# Altium PCB TYPEB.PcbDoc
Units mm, origin at the board's own origin, x right, y up, seen from the top; angles counter-clockwise.
Board outline 17.3 x 11 mm, 2 copper layers (Top Layer, Bottom Layer), stack 1.5 mm thick; 12 components, 5 nets, 48 pads, 0 vias.
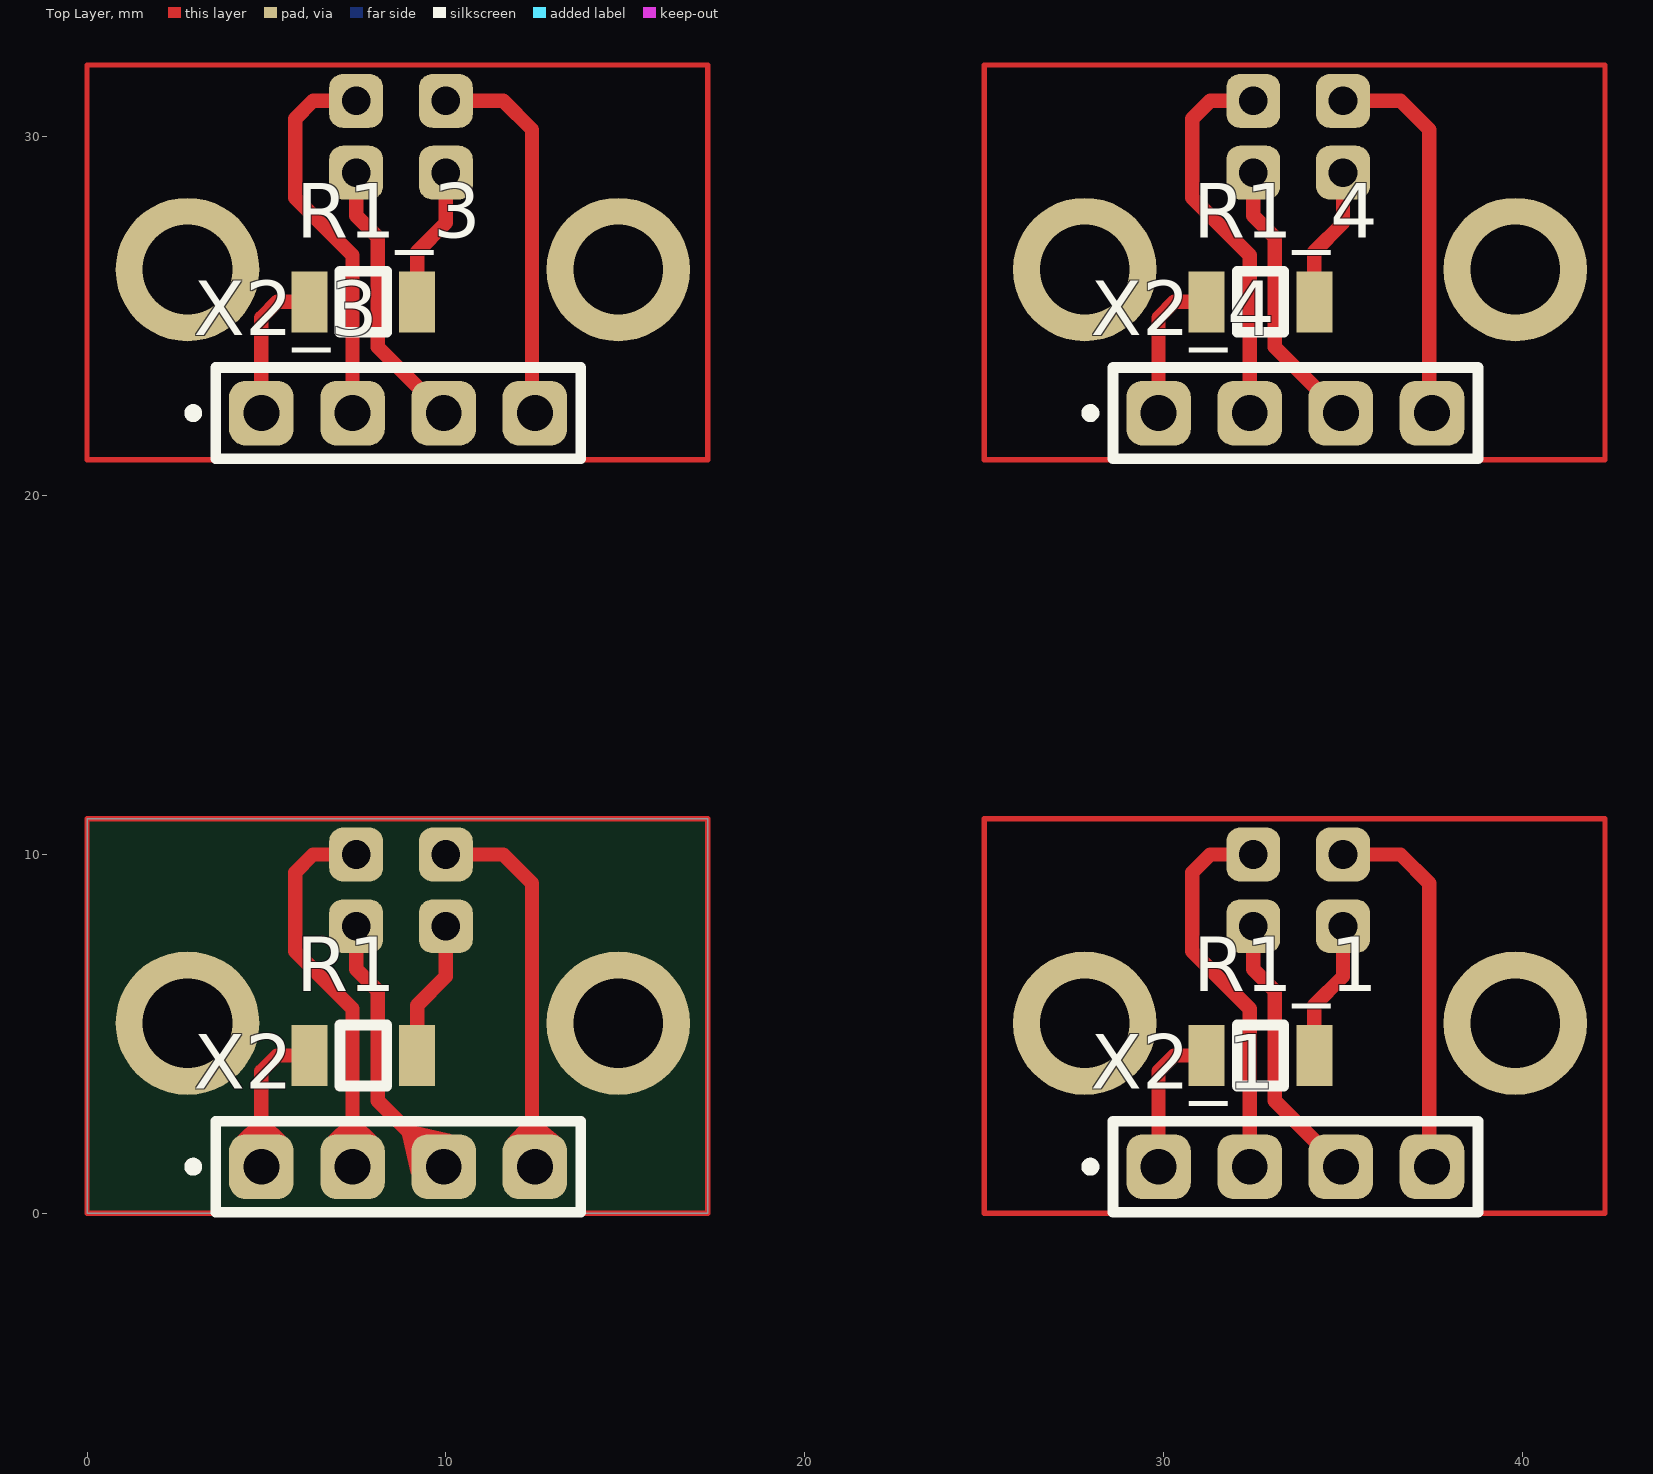
[diagram p0: Top Layer view]
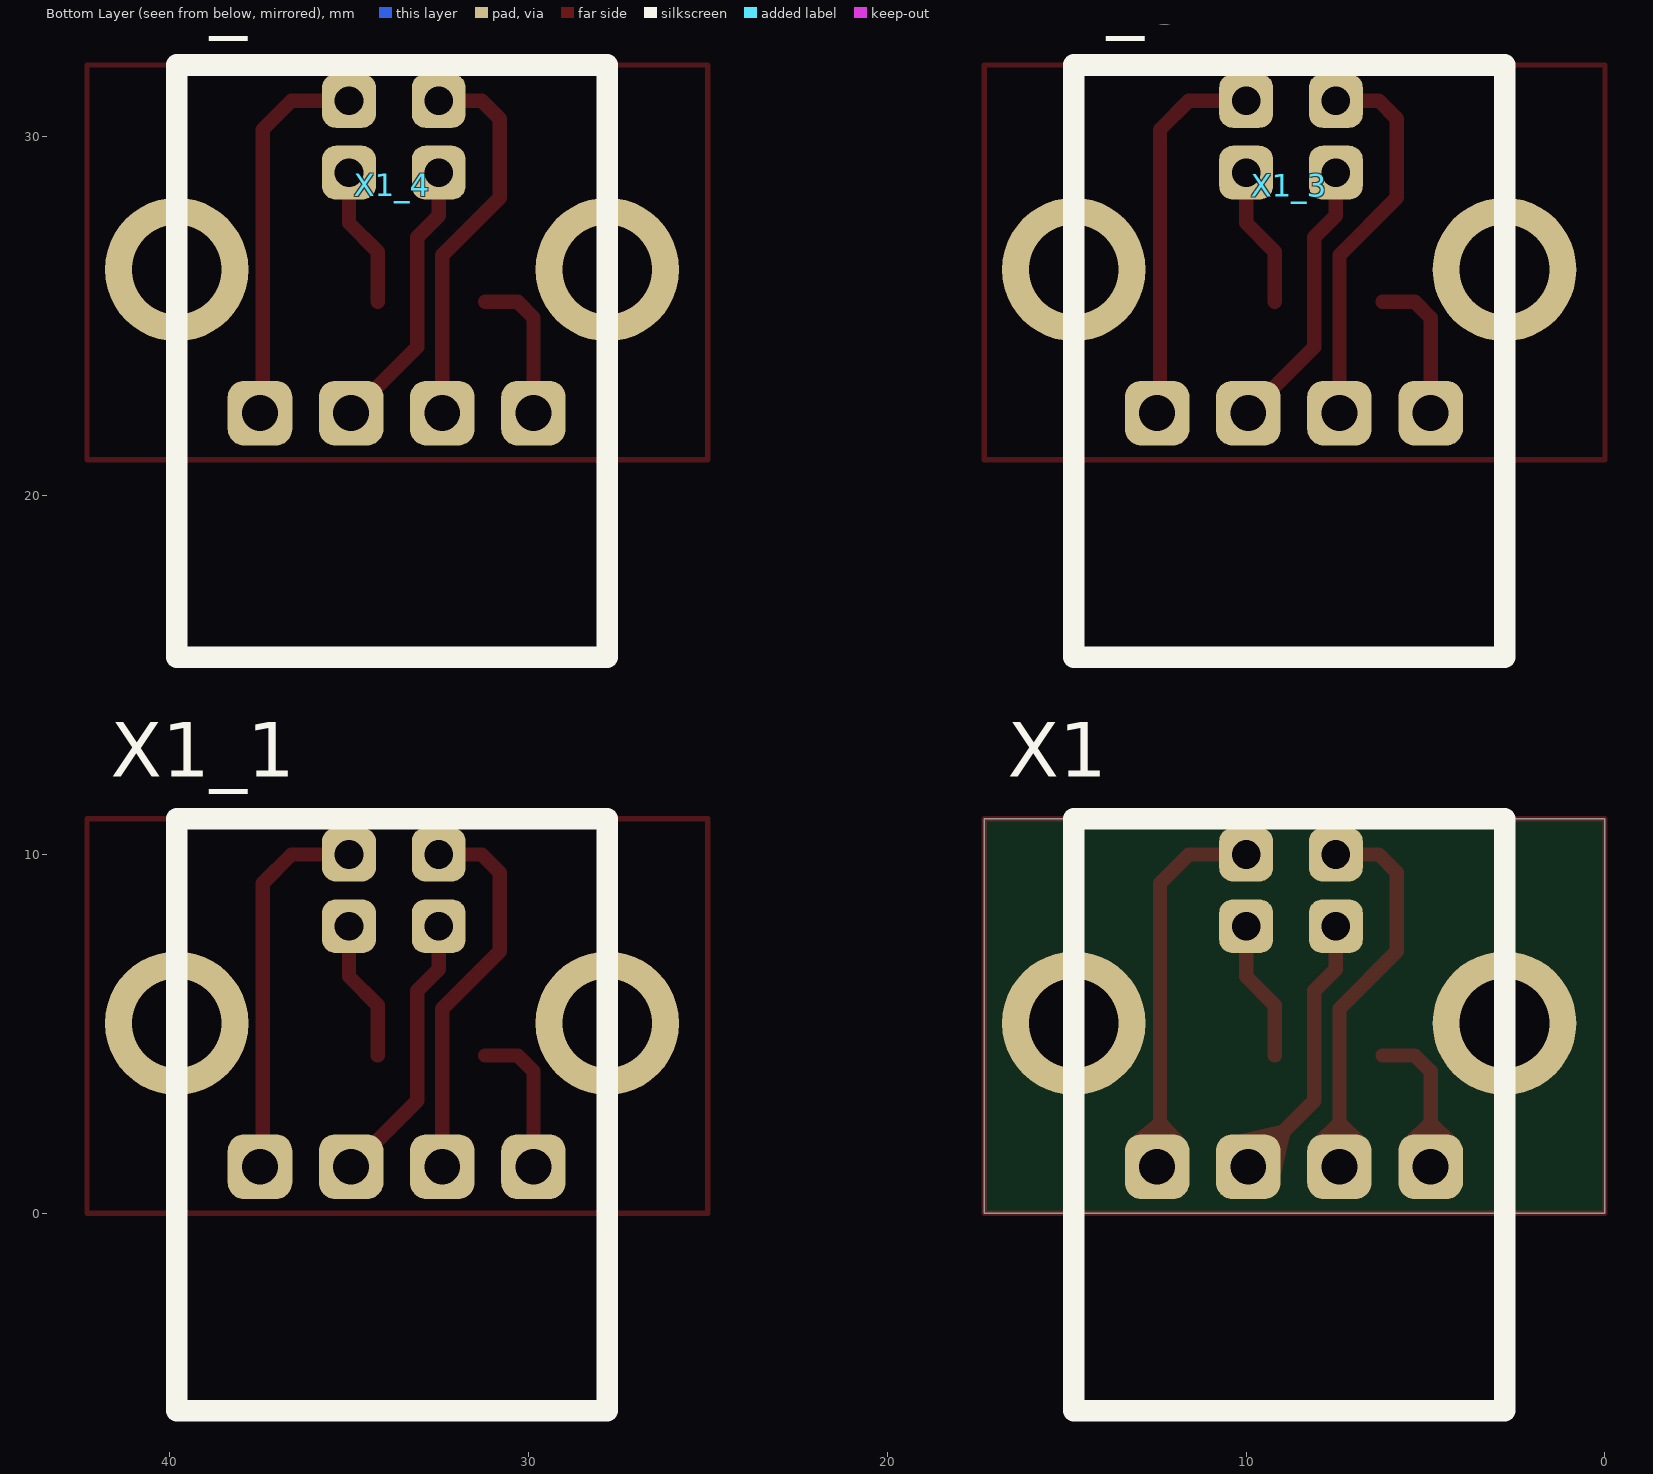
[diagram p1: Bottom Layer view, seen from below]

## Layer stack, top to bottom
Top Solder: solder mask 0.05, Solder Resist, Dk 3.5
Top Layer: signal copper 0.018
Dielectric 1: dielectric 1.464, FR-4, Dk 4.8
Bottom Layer: signal copper 0.018
Bottom Solder: solder mask 0.05, Solder Resist, Dk 3.5

## Board outline
0,0 17.3,0 17.3,11 0,11

## Design rules (kind name [scope] priority, off if disabled: settings)
BoardOutlineClearance [All] p1: gap=0.5 ignorepadtopadclearanceinfootprint=FALSE
Clearance [All] p1: gap=0.2 ignorepadtopadclearanceinfootprint=FALSE
ComponentClearance [All] p1: gap=0.5 collisioncheckmode=3 verticalgap=0.5 showdistances=FALSE
Height [All] p1: minheight=0 maxheight=50 prefheight=12.7
HoleSize [All] p1: absolutevalues=TRUE maxlimit=20 minlimit=0.4 maxpercent=80.000 minpercent=20.000
MinimumSolderMaskSliver [All] p1: minsoldermaskwidth=0.2
PolygonConnect PolygonConnect_Via [All] p1: connectstyle=Direct reliefconductorwidth=0.254 reliefentries=4 polygonreliefangle="90 Angle" airgapwidth=0.254
PolygonConnect [All] p2: connectstyle=Relief reliefconductorwidth=0.3 reliefentries=4 polygonreliefangle="90 Angle" airgapwidth=0.3
RoutingVias [All] p1: holewidth=0.711 width=1.27 viastyle="Through Hole" minholewidth=0.711 minwidth=1.27 maxholewidth=0.711 maxwidth=1.27
SilkToSilkClearance [All] p1: silktosilkclearance=0
SilkToSolderMaskClearance [IsPad] p1: minsilkscreentomaskgap=0.1 clearancetoexposedcopper=TRUE
SolderMaskExpansion [All] p1: expansion=0.1
Width [All] p1: maxlimit=2.5 minlimit=0.25 preferedwidth=0.3
24 further rules are at their usual default settings.

## Classes and differential pairs
component class TYPEB: R1 X1 X2

## Components (designator, comment, footprint, x,y, rotation, side; value= is the part's Value field where it differs from the comment)
R1 "0 Ом" R1206H07 7.7,4.4 r0 top value=0Оhm
R1_1 "0 Ом" R1206H07 32.7,4.4 r0 top value=0Оhm (schematic designator R1)
R1_3 "0 Ом" R1206H07 7.7,25.4 r0 top value=0Оhm (schematic designator R1)
R1_4 "0 Ом" R1206H07 32.7,25.4 r0 top value=0Оhm (schematic designator R1)
X1 "TYPE_B" Type_B 10,8 r180 bottom
X1_1 "TYPE_B" Type_B 35,8 r180 bottom (schematic designator X1)
X1_3 "TYPE_B" Type_B 10,29 r180 bottom (schematic designator X1)
X1_4 "TYPE_B" Type_B 35,29 r180 bottom (schematic designator X1)
X2 "PLS-04" PLS-04 4.86,1.3 r0 top
X2_1 "PLS-04" PLS-04 29.86,1.3 r0 top (schematic designator X2)
X2_3 "PLS-04" PLS-04 4.86,22.3 r0 top (schematic designator X2)
X2_4 "PLS-04" PLS-04 29.86,22.3 r0 top (schematic designator X2)

## Footprints (in the part's own frame and the unit in brackets; to place one, negate y for a bottom-side part, rotate by r counter-clockwise, add the part's x,y. Pads: shape width x height; smd on the part's side, far side on the other; paste and mask are expansions set on the pad)
PLS-04 [mm] "4-Leads PLS-connector, Pitch 2.54mm, IPC Medium Density"
  rrect50% 1.8x1.8 hole 1: 1(0,0) 2(2.54,0) 3(5.08,0) 4(7.62,0)
  silkscreen extent -2,-1.27 8.9,1.27, body extent -1.27,-1.25 8.89,1.25, height 8.54
R1206H07 [mm] "Chip Resistor, 2-Leads, Body 3,20x1,60mm, IPC High Density"
  rect 1x1.7 smd: 1(-1.5,0) 2(1.5,0)
  silkscreen extent -0.65,-0.85 0.65,0.85, body extent -1.68,-0.87 1.68,0.87, height 0.7
Type_B [mm]
  rrect50% 1.5x1.5 hole 0.8: 1(0,0) 2(2.5,0) 3(2.5,2) 4(0,2)
  round 4 hole 2.5: 5(-4.8,-2.7) 6(7.2,-2.7)
  silkscreen extent -4.8,-13.5 7.2,3, body extent -6.17,-13.1 8.78,3.4, height 11.3

## Part data
R1 R1_1 R1_3 R1_4: library part "R1206 0Ohm_5", "Постоянный ЧИП резистор", Package=1206, PackageType=RES-CHIP, Part Number="1206 0 Ом±5%", Power=0.25W, TemperatureOperating_max=155, TemperatureOperating_min=-55, Tolerance=±5%, ComponentLink1Description="Ссылка на сайт производителя", ComponentLink2Description="Ссылка на сайт производителя", ComponentLink3Description="Ссылка на сайт производителя", FullName="Резистор 1206 0 Ом±5%", HelpURL="D:\Local_view\PDM\Справочники\Перечень ЭРИ\Документация\Резисторы\Постоянные\ЧИП\RC1206_yageo.pdf", ID="R1206 0Ohm_5", Mounting=SMT, Type=Резистор
X1 X1_1 X1_3 X1_4: library part USB_type_B, "USB_type_B", Manufacturer="Texas Instruments", Package=SOT23-6, ValueBOM="DType: Микросхема TYPE_B Texas Instruments", ComponentLink1Description=Datasheet, ComponentLink1URL="c:\Dataseets\Микросхемы\По фирмам\Avago Technologies\HCPL-4100.pdf", DType=Микросхема, ValueSCH=TYPE_B
X2 X2_1 X2_3 X2_4: "Вилка на плату прямая шаг 2,54 мм 1 ряд", Current=1А, PackageType=CON-PLD, TemperatureOperating_max=105, TemperatureOperating_min=-25, Voltage_max=250V, ComponentLink1Description="Ссылка на сайт производителя", ComponentLink2Description="Ссылка на сайт производителя", ComponentLink3Description="Ссылка на сайт производителя", FullName="Вилка PLS-04", HelpURL="D:\Local_view\PDM\Справочники\Перечень ЭРИ\Документация\Соединители\Прямоугольные\pld_pls.pdf", ID=PLS-04, Mounting=THT, Package=PLS-04, Part Number=PLS-04, Type=Вилка

## Nets (pads, with @x,y where several pads share a name; then routed paths per layer and width w, separated by ;. In a path a pad name is that pad's centre, name@x,y a point inside that pad or via, vN(x,y) a via of type N, cw(c..) or ccw(c..) an arc to the next point about the centre after c; other vN are vias at no path point)
NetR1_1: R1.1 X2.1 | length 4.2
  Top Layer w0.4: X2.1 4.86,3.96 5.3,4.4 R1.1
NetR1_2: R1.2 X1.1 | length 3.9
  Top Layer w0.4: R1.2 9.2,5.8 10,6.6 X1.1
NetX1_2: X1.2 X2.3 | length 7.7
  Top Layer w0.4: X1.2 7.5,6.8 8.1,6.2 8.1,3.14 X2.3
NetX1_3: X1.3 X2.2 | length 10.8
  Top Layer w0.4: X2.2 7.4,5.7 5.8,7.3 5.8,9.5 6.3,10 X1.3
NetX1_4: X1.4 X2.4 | length 10.7
  Top Layer w0.4: X1.4 11.6,10 12.4,9.2 12.4,1.3 X2.4
pads on no net: R1_1.1 R1_1.2 R1_3.1 R1_3.2 R1_4.1 R1_4.2 X1.5 X1.6 X1_1.1 X1_1.2 X1_1.3 X1_1.4 X1_1.5 X1_1.6 X1_3.1 X1_3.2 X1_3.3 X1_3.4 X1_3.5 X1_3.6 X1_4.1 X1_4.2 X1_4.3 X1_4.4 X1_4.5 X1_4.6 X2_1.1 X2_1.2 X2_1.3 X2_1.4 X2_3.1 X2_3.2 X2_3.3 X2_3.4 X2_4.1 X2_4.2 X2_4.3 X2_4.4
copper on no net: | length 338.3
  Top Layer w0.15: 0,0 17.3,0 17.3,11 17,11 0,11 0,0 ; 0,21 0,32 17,32 17.3,32 17.3,21 0,21 ; 25,0 25,11 42,11 42.3,11 42.3,0 25,0 ; 25,21 25,32 42,32 42.3,32 42.3,21 25,21
  Top Layer w0.4: 4.86,22.3 4.86,24.96 5.3,25.4 6.2,25.4 ; 7.4,22.3 7.4,26.7 5.8,28.3 5.8,30.5 6.3,31 7.5,31 ; 7.5,29 7.5,27.8 8.1,27.2 8.1,24.14 9.94,22.3 ; 9.2,25.4 9.2,26.8 10,27.6 10,29 ; 10,31 11.6,31 12.4,30.2 12.4,22.3 12.48,22.3 ; 29.86,1.3 29.86,3.96 30.3,4.4 31.2,4.4 ; 29.86,22.3 29.86,24.96 30.3,25.4 31.2,25.4 ; 32.4,1.3 32.4,5.7 30.8,7.3 30.8,9.5 31.3,10 32.5,10 ; 32.4,22.3 32.4,26.7 30.8,28.3 30.8,30.5 31.3,31 32.5,31 ; 32.5,8 32.5,6.8 33.1,6.2 33.1,3.14 34.94,1.3 ; 32.5,29 32.5,27.8 33.1,27.2 33.1,24.14 34.94,22.3 ; 34.2,4.4 34.2,5.8 35,6.6 35,8 ; 34.2,25.4 34.2,26.8 35,27.6 35,29 ; 35,10 36.6,10 37.4,9.2 37.4,1.3 37.48,1.3 ; 35,31 36.6,31 37.4,30.2 37.4,22.3 37.48,22.3

## Silkscreen, mask and mechanical layers (free items; w line width, h text height)
Board Outline:
  lines w0.3: 0,0 0,11 17.3,11 17.3,0 0,0 ; 0,21 17.3,21 17.3,32 0,32 0,21 ; 25,0 42.3,0 42.3,11 25,11 25,0 ; 25,21 42.3,21 42.3,32 25,32 25,21

## Text inside footprints (layer, text, board x,y; h text height)
X2: Top Annotation "4" at 12.36,0.8 h1.5; Top Annotation "1" at 4.606,0.792 h1.5
X2_1: Top Annotation "4" at 37.36,0.8 h1.5; Top Annotation "1" at 29.606,0.792 h1.5
X2_3: Top Annotation "4" at 12.36,21.8 h1.5; Top Annotation "1" at 4.606,21.792 h1.5
X2_4: Top Annotation "4" at 37.36,21.8 h1.5; Top Annotation "1" at 29.606,21.792 h1.5